# EAGLE board lc-meter-lm311 (EAGLE 5.07)
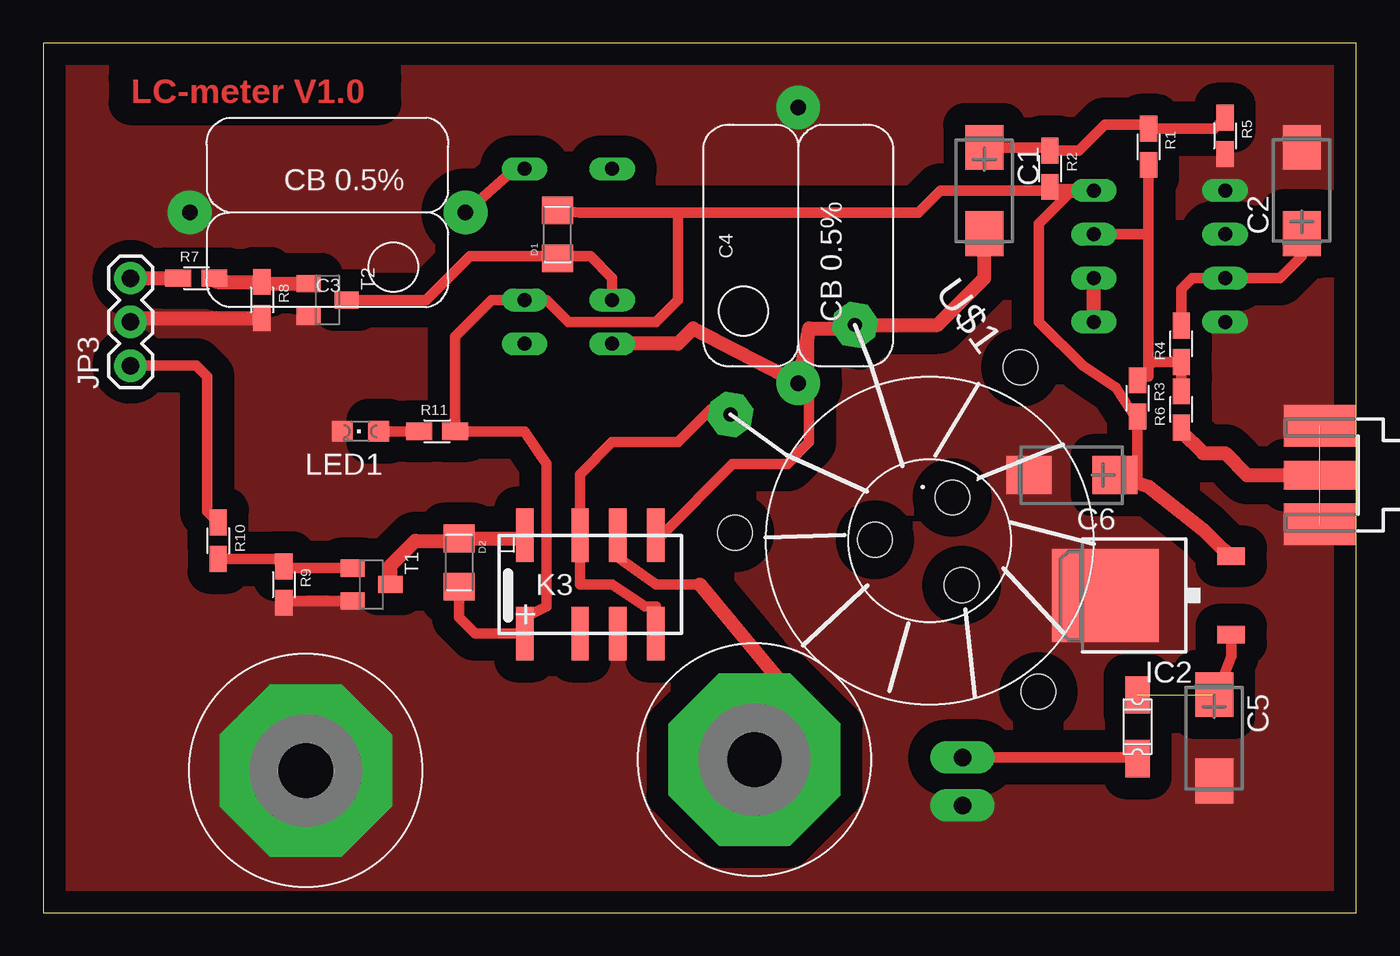
[diagram p0: board, top side]
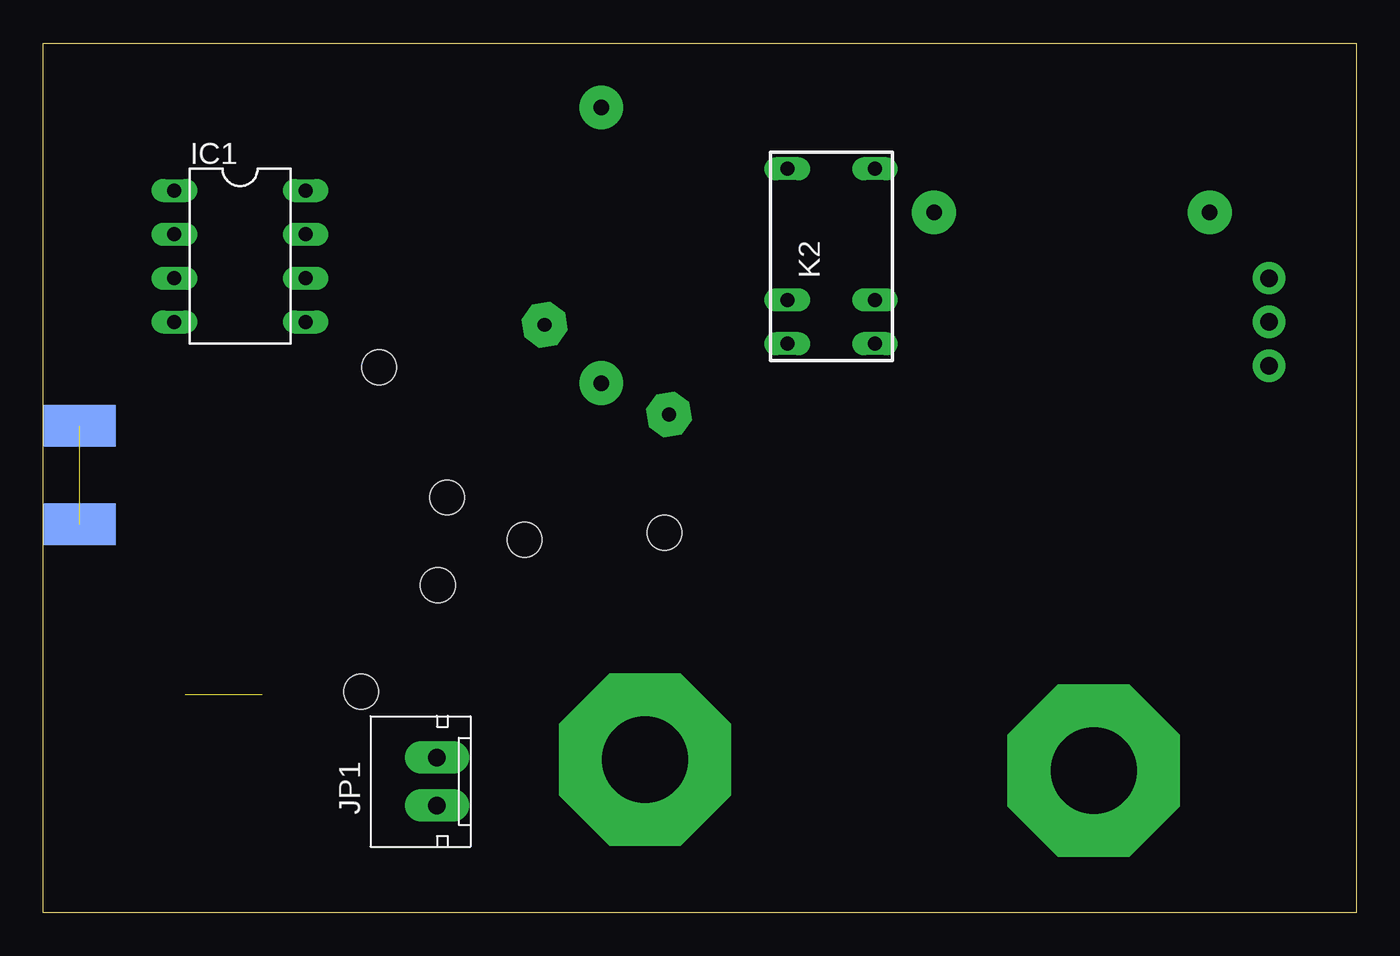
[diagram p1: board, bottom side, seen from below]

Size 76.2 x 50.47 mm. Coordinates in mm from the lower left corner, seen from the top.
Outline: 0,0 76.18,0 76.18,50.47 0,50.47 0,0
Copper layers (1*16): Top 0.035mm / dielectric 1.5mm / Bottom 0.035mm
Design rules "default": minimum track width 10mil, minimum drill 24mil, track to track 8mil, track to pad 8mil, pad to pad 8mil, via to via 8mil, smd to smd 8mil, copper to edge 40mil, drill to drill 8mil, minimum pad ring 10mil, minimum via ring 8mil, stop-mask expansion 4mil, vias tented up to drill 0mil, thermal gap 10mil

## Footprints (pad centres in the part's own frame; a part is rotated, then mirrored left to right if it is on the bottom)
CT6032 = smd 2.6 x 2.2: + -2.5,0; - 2.5,0
CB-1.3CM = drill 0.9 pad 2.54 round: 1 -8,0; 2 8,0
1206-DIODE = smd 1.6 x 1.8: A -1.4,0; K 1.4,0
1206L = smd 2.16 x 1.4: P$1 -1.85,0; P$2 1.85,0
DIL-08 = drill 0.813 long: 1 -3.81,-3.81; 2 -1.27,-3.81; 3 1.27,-3.81; 4 3.81,-3.81; 5 3.81,3.81; 6 1.27,3.81; 7 -1.27,3.81; 8 -3.81,3.81
TO252 = smd 1 x 1.6: 1 -2.28,-4.8; 2 2.28,-4.8 | smd 5.4 x 6.2: 3 0,2.5
XH-1X2-LONG-LOCK-V = drill 1.016 pad 1.88 long: 1 -1.397,0; 2 1.397,0
1X03 = drill 1.016 pad 1.88 round: 1 0,0; 2 2.54,0; 3 5.08,0
G5V1 = drill 0.813 long: 1 -5.08,-2.54; 2 -2.54,-2.54; 5 5.08,-2.54; 6 5.08,2.54; 9 -2.54,2.54; 10 -5.08,2.54
UB2-NU = smd 1 x 3.1: P$1 -3.8,2.85; P$2 -0.6,2.85; P$3 1.6,2.85; P$4 3.8,2.85; P$5 3.8,-2.85; P$6 1.6,-2.85; P$7 -0.6,-2.85; P$8 -3.8,-2.85
CHIPLED_0805 = smd 1.2 x 1.2: A 0,-1.05; C 0,1.05
R0805W = smd 1.5 x 1: 1 -1.052,0; 2 1.052,0
SOT23-BEC = smd 1 x 1.4: B -0.95,-1.1; C 0,1.1; E 0.95,-1.1
T68-PIN2 = drill 0.8 pad 2.54 octagon: 3 12.7,5.08; 4 12.7,-3.81 | hole 2: 1.905,2.54; 6.985,8.89; 1.27,-2.54; 5.08,-10.16; -3.175,0; -10.795,0
SOCK-5MM = drill 5 pad 10 octagon: P$1 0,0
SMA-KE = smd 4.191 x 1.651: 1 2.115,0 | smd 4.191 x 2.413: G@1 2.115,2.86; G@2 2.115,-2.86 | smd 4.191 x 2.413 bottom: G@3 2.115,2.86; G@4 2.115,-2.86

## Placement (x,y rotation side)
C1  47uF  [CT6032]  54.61,41.91 270 top
C2  47uF  [CT6032]  73.03,41.91 90 top
C3  950pF  [CB-1.3CM]  16.51,40.64 180 top
C4  950pF  [CB-1.3CM]  43.81,38.73 90 top
C5  [CT6032]  67.94,10.16 270 top
C6  [CT6032]  59.69,25.4 180 top
D1  1N4148DO35-7  [1206-DIODE]  29.84,39.37 90 top
D2  1N4148DO35-7  [1206-DIODE]  24.13,20.32 270 top
F1  PTC-FUSE1206L  [1206L]  63.5,10.79 90 top
IC1  LM311NL  [DIL-08]  64.77,38.1 270 bottom
IC2  7805DT  [TO252]  64.14,18.41 90 top
JP1  [XH-1X2-LONG-LOCK-V]  53.34,7.62 270 bottom
JP3  [1X03]  5.08,31.75 90 top
K2  RELAY-SPDTG5V1  [G5V1]  30.48,38.1 90 bottom
K3  RELAY-DPDTUB2  [UB2-NU]  31.75,19.05 0 top
LED1  [CHIPLED_0805]  18.41,27.94 90 top
R1  100k  [R0805W]  64.14,44.45 270 top
R2  100k  [R0805W]  58.42,43.18 270 top
R3  1k  [R0805W]  63.5,29.84 270 top
R4  47k  [R0805W]  66.04,33.02 90 top
R5  100k  [R0805W]  68.58,45.09 270 top
R6  47k  [R0805W]  66.04,29.21 90 top
R7  1k  [R0805W]  8.89,36.83 0 top
R8  100k  [R0805W]  12.7,35.56 270 top
R9  100k  [R0805W]  13.97,19.05 270 top
R10  1k  [R0805W]  10.16,21.59 270 top
R11  1k  [R0805W]  22.86,27.94 0 top
T1  [SOT23-BEC]  19.05,19.05 270 top
T2  [SOT23-BEC]  16.51,35.56 270 top
U$1  ML-T68  [T68-PIN2]  51.44,21.59 125.8 top
U$2  SOCK  [SOCK-5MM]  15.24,8.26 0 top
U$4  SOCK  [SOCK-5MM]  41.27,8.89 0 top
X1  SMA--KE  [SMA-KE]  76.2,25.4 180 top

## Library data of the parts
C1-C6 D1 D2 F1 IC1 JP1 JP3 K2 K3 LED1 R1-R11 T1 T2 U$2 U$4 = digital-toy
IC2 = linear
U$1 X1 = dtoy-RF

## Nets
CAL: JP3.3 R7.1
GND: C2.- C3.2 C4.2 C5.- C6.- IC1.1 IC1.4 IC2.3 JP1.2 JP3.2 K3.P$6 LED1.C R5.2 R8.2 R9.2 T1.E T2.E U$2.P$1 X1.G@1 X1.G@2 X1.G@3 X1.G@4
N$1: K3.P$3 U$4.P$1
N$2: C1.+ R1.1 R2.1 R5.1
N$3: C2.+ IC1.3 R4.2
N$4: IC1.7 R1.2 R3.1 R4.1 R6.2
N$5: IC1.5 IC1.6
N$6: D2.A K3.P$1 T1.C
N$7: C3.1 K2.5
N$8: C1.- C4.1 K2.10 K3.P$4 U$1.4
N$9: R6.1 X1.1
N$10: D1.A K2.9 T2.C
N$11: R7.2 R8.1 T2.B
N$12: K3.P$2 K3.P$5 U$1.3
N$13: F1.P$1 JP1.1
N$14: C5.+ F1.P$2 IC2.1
N$15: R9.1 R10.2 T1.B
N$16: JP3.1 R10.1
N$17: LED1.A R11.1
VCC: C6.+ D1.K D2.K IC1.8 IC2.2 K2.2 K3.P$8 R2.2 R3.2 R11.2

## Tracks (layer width: path | path; a pad name or v marks a point on that pad's centre or on a via)
CAL
  Top 0.813: JP3.3 R7.1
GND  (3 unrouted)
  Top 0.61: T1.E 14.07,18.1 R9.2
  Top 0.813: JP3.2 arc-90 5.3,34.51 R8.2
  pour Top (isolate 1.27, no thermals): -5.08,59.69 82.55,59.69 90.81,50.8 90.81,-3.81 80.01,-10.79 0,-10.79 -10.79,-3.17 -10.79,53.98
N$1
  Top 0.61: 38.1,19.05 35.56,19.05 33.35,20.62 K3.P$3
  Top 0.813: U$4.P$1 44.45,11.43 38.1,19.05
N$2
  Top 0.61: C1.+ 58.24,44.41 R2.1 60.11,44.23 61.59,45.72 63.92,45.72 R1.1 67.94,45.5 R5.1
N$3
  Top 0.61: C2.+ 73.03,38.1 71.75,36.83 IC1.3 66.67,36.83 66.04,36.2 R4.2
N$4
  Top 0.61: R6.2 R4.1 64.35,31.97 64.14,31.75 | 64.14,31.75 64.14,31.11 63.72,31.11 R3.1 | 64.14,31.75 64.14,39.37 | 64.14,39.37 R1.2 | 64.14,39.37 IC1.7
N$5
  Top 0.813: IC1.5 IC1.6
N$6
  Top 0.813: T1.C 20.15,20.15 21.59,21.59 24.13,21.59 D2.A 27.77,21.72 K3.P$1
N$7
  Top 0.61: C3.1 27.68,43.44 K2.5
N$8
  Top 0.61: K3.P$4 35.87,21.9 40.01,26.04 43.18,26.04 44.45,27.3 44.45,33.91
  Top 0.813: K2.10 36.83,33.02 37.72,33.91 C4.1 44.45,33.91 47.52,33.91 U$1.4 51.9,34.12 54.61,36.83 C1.-
N$9
  Top 0.813: X1.1 69.85,25.4 68.58,26.67 67.31,26.67 66.04,27.94 R6.1
N$10
  Top 0.61: K2.9 33.02,36.83 31.75,38.1 29.98,38.1 D1.A 29.71,38.1 24.77,38.1 22.23,35.56 T2.C
N$11
  Top 0.813: R7.2 arc90 10.16,36.61 R8.1 arc90 12.8,36.51 T2.B
N$12
  Top 0.61: K3.P$5 35.56,17.78 34.92,17.78 33.02,19.05 31.15,19.05 K3.P$2 31.15,25.43 33.02,27.3 36.83,27.3 38.73,29.21 40.23,29.21 U$1.3
  Top 0.813: K3.P$5
N$13
  Top 0.61: JP1.1 63.43,9.02 F1.P$1
N$14  (1 unrouted)
  Top 0.61: IC2.1 68.95,14.87 68.58,13.97 C5.+
N$15
  Top 0.61: T1.B 14.07,20 R9.1 13.54,20.54 R10.2
N$16
  Top 0.61: JP3.1 8.89,31.75 9.53,31.11 9.53,23.28 R10.1
N$17
  Top 0.61: LED1.A R11.1
VCC
  Top 0.61: D2.K 24.13,17.14 25.07,16.2 K3.P$8 27.94,17.14 29.21,17.78 29.21,26.04 27.94,27.94 R11.2 23.91,33.44 26.04,35.56 K2.2 29.21,35.56 30.48,34.29 35.56,34.29 36.83,35.56 36.83,40.64 | D1.K 31.11,40.64 36.83,40.64 | 36.83,40.64 50.8,40.64 52.07,41.91 58.2,41.91 R2.2 | C6.+ 63.5,25.4 63.5,28.57 | 63.5,28.57 62.23,30.48 60.33,31.75 57.78,34.29 57.78,40.01 59.69,41.91 IC1.8 | 63.5,28.57 R3.2
  Top 0.813: IC2.2 68.3,21.23 67.31,22.23 64.14,24.73 C6.+ | IC1.8 58.64,41.91 R2.2

## Text on the board
Top: LC-meter V1.0